# Altium PCB binbot_board_ver4.PcbDoc
Units mm, origin at the board's own origin, x right, y up, seen from the top; angles counter-clockwise.
Board outline 120.96 x 80.83 mm, 2 copper layers (Top Layer, Bottom Layer); 24 components, 0 nets, 102 pads, 50 vias.
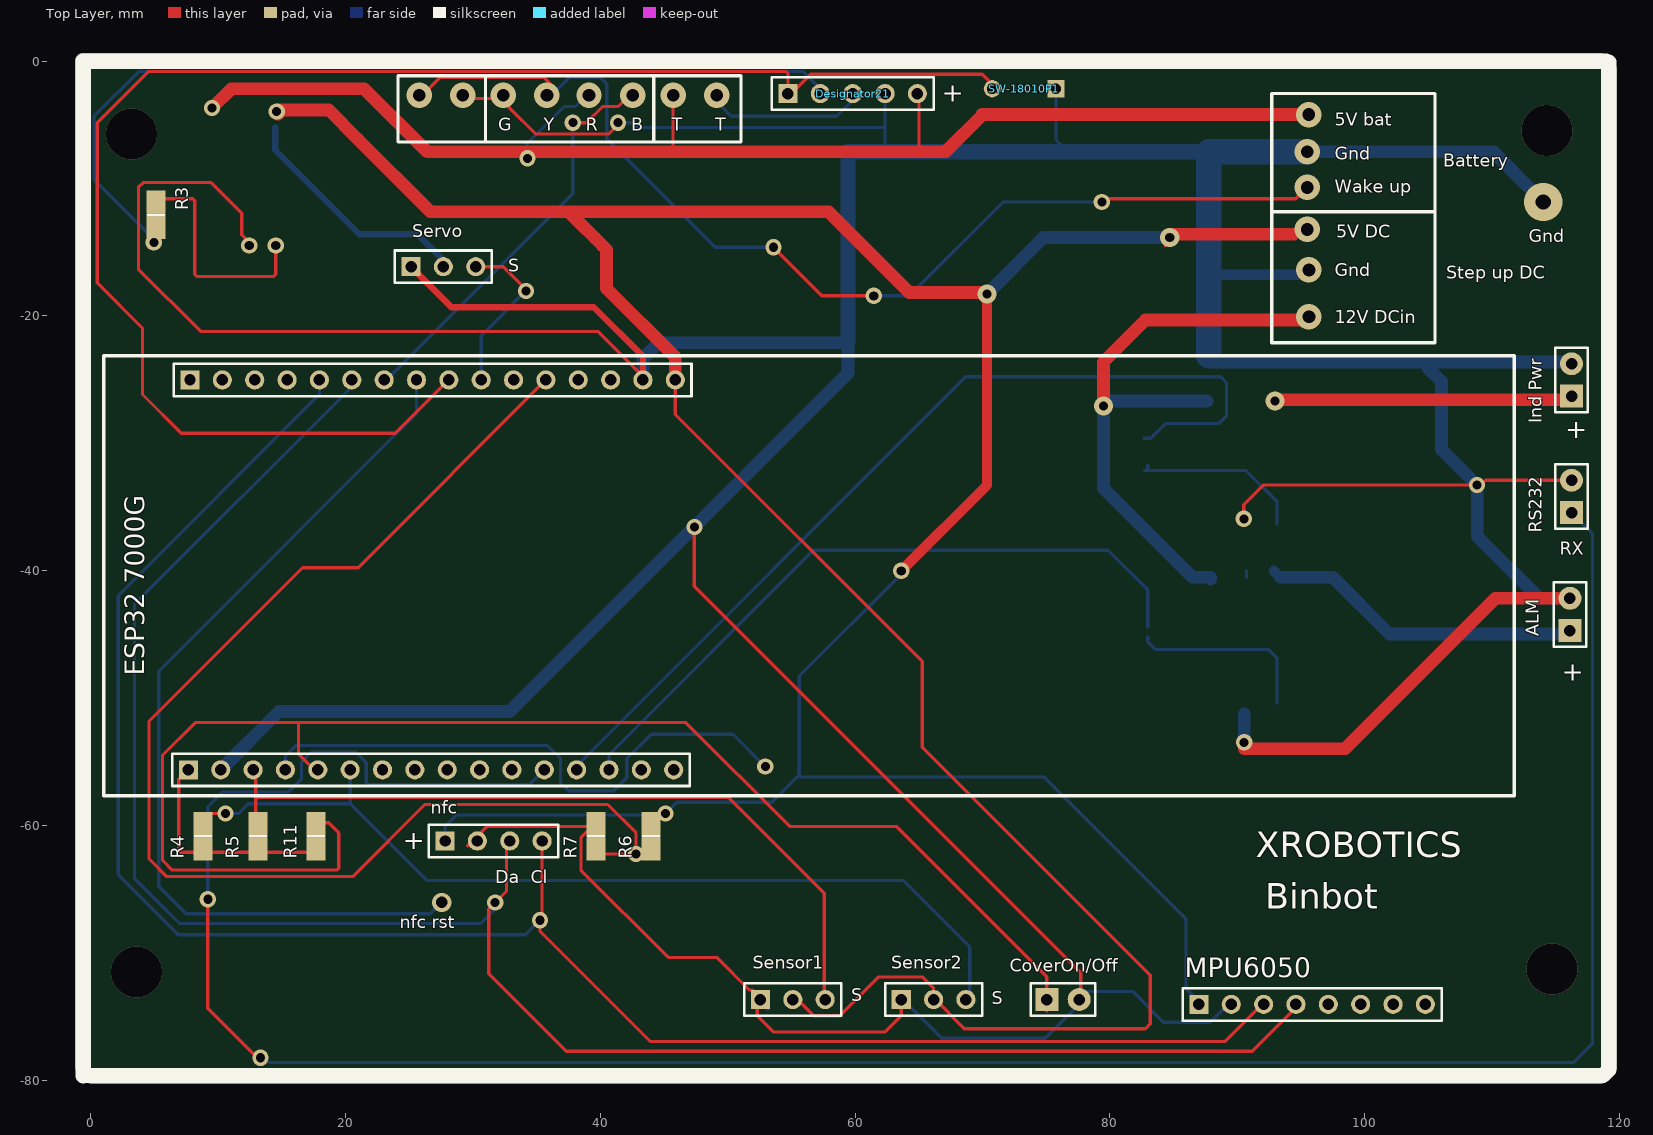
[diagram p0: Top Layer view]
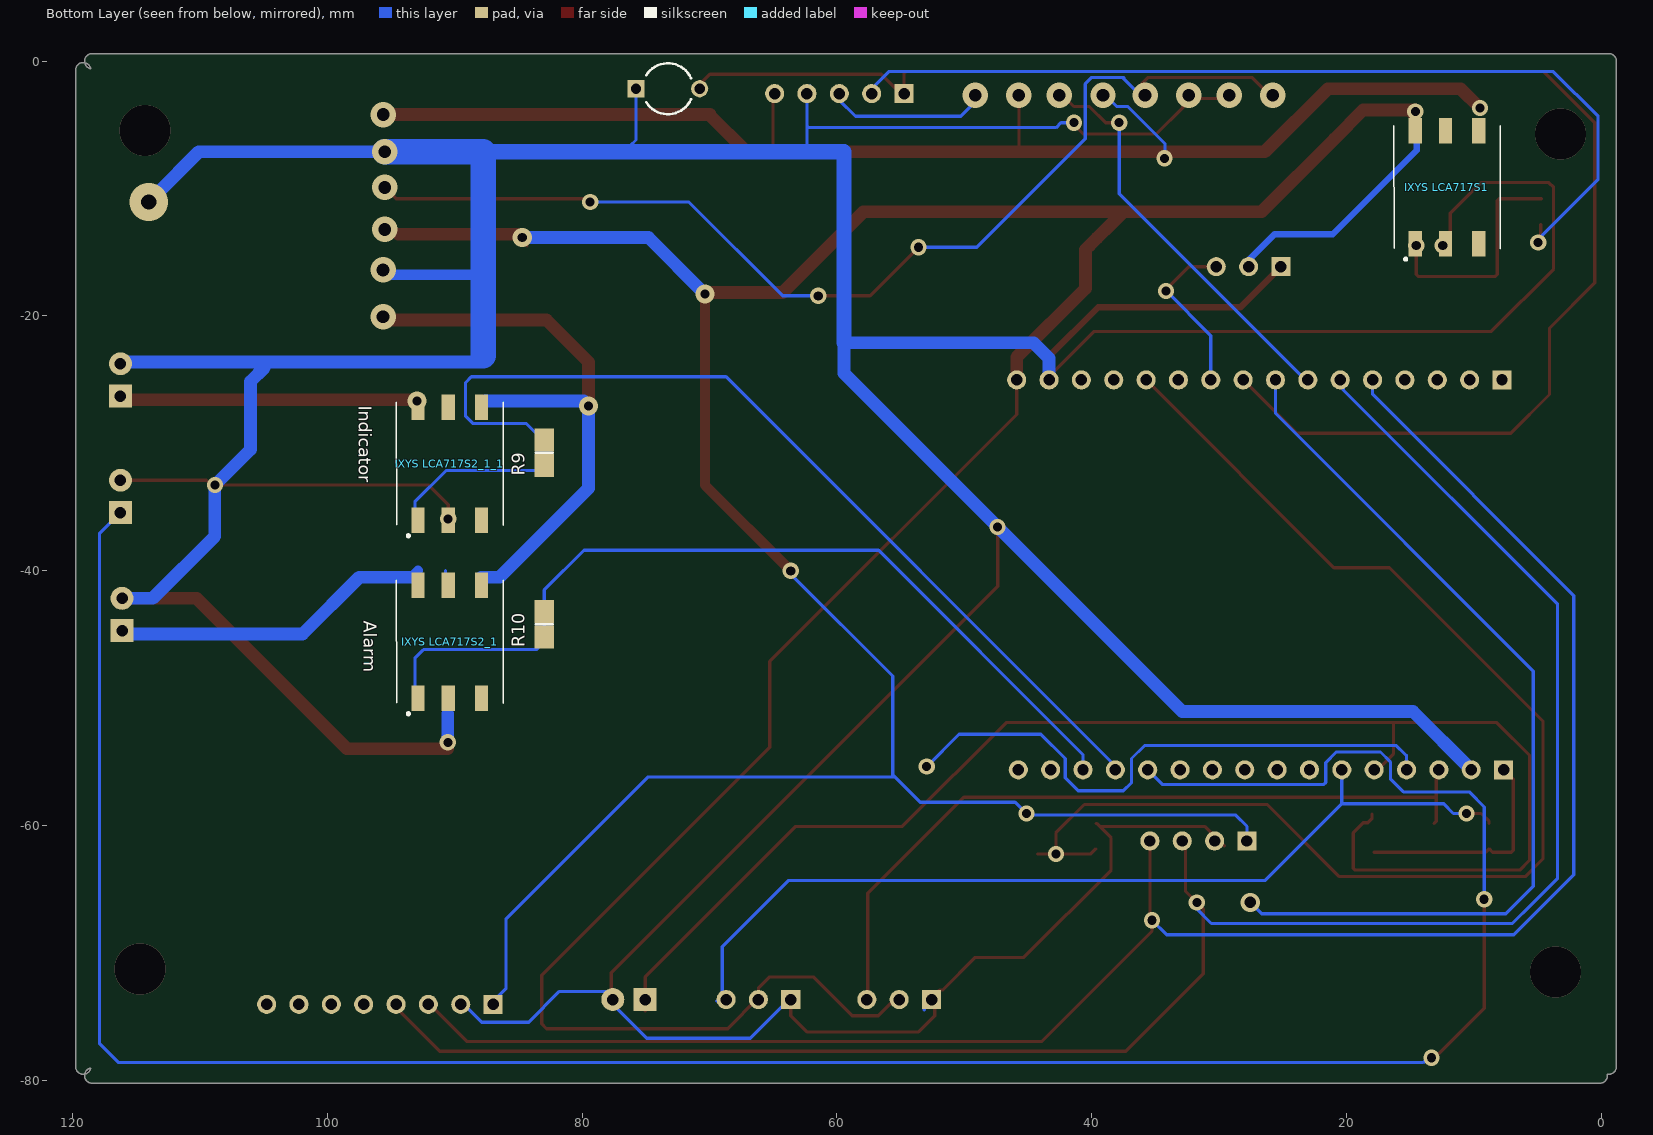
[diagram p1: Bottom Layer view, seen from below]

## Layer stack, top to bottom
Top Solder: solder mask 0.0102, Solder Resist, Dk 3.5
Top Layer: signal copper 0.0356
Dielectric 1: dielectric 0.32, FR-4, Dk 4.8
Bottom Layer: signal copper 0.0356
Bottom Solder: solder mask 0.0102, Solder Resist, Dk 3.5

## Board outline
-0.475,-79.516 cw(c-0.589,-78.926) -1.189,-78.926 -1.189,0 cw(c-0.589,0) -0.589,0.6 118.469,0.6 cw(c118.469,0) 119.07,0 119.059,-0.113 cw(c118.469,0) 118.583,-0.59 cw(c119.172,-0.703) 119.059,-0.113 cw(c119.172,-0.703) 119.773,-0.703 119.773,-78.926 cw(c119.172,-78.926) 119.059,-79.516 cw(c119.172,-78.926) 118.583,-79.039 cw(c118.469,-79.629) 119.059,-79.516 119.07,-79.629 cw(c118.469,-79.629) 118.469,-80.229 0.114,-80.229 cw(c0.114,-79.629)

## Design rules (kind name [scope] priority, off if disabled: settings)
Clearance [All] p1: gap=0.254 ignorepadtopadclearanceinfootprint=FALSE except(0: Arc-Hole Track-Hole SMDPad-Hole THPad-Hole Via-Hole Fill-Hole Poly-Hole Region-Hole Text-Hole)
PolygonConnect [All] p1: connectstyle=Relief reliefconductorwidth=0.254 reliefentries=4 polygonreliefangle="90 Angle" airgapwidth=0.254
RoutingVias [All] p1: holewidth=0.711 width=1.27 viastyle="Through Hole" minholewidth=0.711 minwidth=1.27 maxholewidth=0.711 maxwidth=1.27
SolderMaskExpansion [All] p1: expansion=0.102 istentingtop=FALSE
Width [All] p1: maxlimit=0.254 minlimit=0.254 preferedwidth=0.254
30 further rules are at their usual default settings.

## Components (designator, comment, footprint, x,y, rotation, side; value= is the part's Value field where it differs from the comment)
ALM "Comment" HDR1X2 116.251,-26.289 r90 top
CoverOn/Off "Comment" HDR1X2 75.057,-73.66 r0 top
Designator21 "Comment" HDR1X5 54.737,-2.54 r0 top
"ESP32 7000G" "ESP32 7000G" HDR1X16 7.793,-25.019 r0 top
"Ind Pwr" "Comment" HDR1X2 116.124,-44.704 r90 top
"IXYS LCA717S1" "IXYS LCA717S" *SON160P500X500X140-6N 12.111,-9.897 r90 bottom
"IXYS LCA717S2_1" "IXYS LCA717S" *SON160P500X500X140-6N 90.394,-45.584 r90 bottom
"IXYS LCA717S2_1_1" "IXYS LCA717S" *SON160P500X500X140-6N 90.394,-31.614 r90 bottom
MPU6050 "Comment" HDR1X8 86.995,-74.041 r0 top
nfc "Comment" HDR1X4 27.813,-61.214 r0 top
R3 "0.5K Ohms" 6-0805_M 5.126,-12.065 r90 top (schematic designator R2)
R4 "4.7K Ohms" 6-0805_M 8.809,-60.833 r90 top (schematic designator R3)
R5 "4.7K Ohms" 6-0805_M 13.127,-60.833 r90 top (schematic designator R3)
R6 "0.5K Ohms" 6-0805_M 43.988,-60.833 r90 top (schematic designator R3)
R7 "1K Ohms" 6-0805_M 39.67,-60.833 r90 top (schematic designator R3)
R9 "0.5K Ohms" 6-0805_M 82.977,-30.75 r90 bottom (schematic designator R3)
R10 "0.5K Ohms" 6-0805_M 82.977,-44.212 r90 bottom (schematic designator R3)
R11 "4.7K Ohms" 6-0805_M 17.699,-60.833 r90 top (schematic designator R3)
RS232 "Comment" HDR1X2 116.251,-35.433 r90 top
Sensor1 "Comment" HDR1X3 52.578,-73.66 r0 top
Sensor2 "Comment" HDR1X3 63.627,-73.66 r0 top
Servo "Comment" HDR1X3 25.146,-16.129 r0 top
SW-18010P1 "SW-18010P" CAPR5-4X5 73.279,-2.159 r180 top
? "Comment" HDR1X16 7.666,-55.626 r0 top

## Footprints (in the part's own frame and the unit in brackets; to place one, negate y for a bottom-side part, rotate by r counter-clockwise, add the part's x,y. Pads: shape width x height; smd on the part's side, far side on the other; paste and mask are expansions set on the pad)
6-0805_M [mm] "Chip Resistor, Body 2.0x1.2mm, IPC Low Density"
  rect 1.8x1.5 smd: 1(-1,0) 2(1,0)
  silkscreen extent 0,-0.65 0,0.65, body extent -1.07,-0.7 1.07,0.7, height 0.7
*SON160P500X500X140-6N [mm]
  rect 2x1.03 smd: 1(-4.436,2.489) 2(-4.436,0.127) 3(-4.436,-2.489) 4(4.436,-2.489) 5(4.436,0.127) 6(4.436,2.489)
  silkscreen extent -5.74,-4.19 4.83,4.19
CAPR5-4X5 [mm] "Capacitor; 2 Leads"
  rect 1.35x1.35 hole 0.8: 1(-2.5,0)
  round 1.35 hole 0.8: 2(2.5,0)
HDR1X2 [mm] "Connector; Header; 2 Position"
  rect 1.8x1.8 hole 0.9: 1(0,0)
  round 1.8 hole 0.9: 2(2.54,0)
  silkscreen extent -1.27,-1.27 3.81,1.27
HDR1X3 [mm] "Connector; Header; 3 Position"
  rect 1.5x1.5 hole 0.9: 1(0,0)
  round 1.5 hole 0.9: 2(2.54,0) 3(5.08,0)
  silkscreen extent -1.27,-1.27 6.35,1.27
HDR1X4 [mm] "Connector; Header; 4 Position"
  rect 1.5x1.5 hole 0.9: 1(0,0)
  round 1.5 hole 0.9: 2(2.54,0) 3(5.08,0) 4(7.62,0)
  silkscreen extent -1.27,-1.27 8.89,1.27
HDR1X5 [mm] "Connector; Header; 5 Position"
  rect 1.5x1.5 hole 0.9: 1(0,0)
  round 1.5 hole 0.9: 2(2.54,0) 3(5.08,0) 4(7.62,0) 5(10.16,0)
  silkscreen extent -1.27,-1.27 11.43,1.27
HDR1X8 [mm] "Connector; Header; 8 Position"
  rect 1.5x1.5 hole 0.9: 1(0,0)
  round 1.5 hole 0.9: 2(2.54,0) 3(5.08,0) 4(7.62,0) 5(10.16,0) 6(12.7,0) 7(15.24,0) 8(17.78,0)
  silkscreen extent -1.27,-1.27 19.05,1.27
HDR1X16 [mm] "Connector; Header; 16 Position"
  rect 1.5x1.5 hole 0.9: 1(0,0)
  round 1.5 hole 0.9: 2(2.54,0) 3(5.08,0) 4(7.62,0) 5(10.16,0) 6(12.7,0) 7(15.24,0) 8(17.78,0) 9(20.32,0) 10(22.86,0) 11(25.4,0) 12(27.94,0) 13(30.48,0) 14(33.02,0) 15(35.56,0) 16(38.1,0)
  silkscreen extent -1.27,-1.27 39.37,1.27

## Part data
SW-18010P1: library part Cap2

## Via types
v1: diameter 1.27, hole 0.711, Top Layer to Bottom Layer, 25 vias
v2: diameter 2, hole 1, Top Layer to Bottom Layer, 14 vias
v3: diameter 1.5, hole 0.711, Top Layer to Bottom Layer, 5 vias
v4: diameter 4, hole 4, Top Layer to Bottom Layer, 4 vias
v5: diameter 1.5, hole 0.9, Top Layer to Bottom Layer, 1 vias
v6: diameter 3, hole 1.2, Top Layer to Bottom Layer, 1 vias

## Nets (pads, with @x,y where several pads share a name; then routed paths per layer and width w, separated by ;. In a path a pad name is that pad's centre, name@x,y a point inside that pad or via, vN(x,y) a via of type N, cw(c..) or ccw(c..) an arc to the next point about the centre after c; other vN are vias at no path point)
pads on no net: "ESP32 7000G.1" "ESP32 7000G.2" "ESP32 7000G.3" "ESP32 7000G.4" "ESP32 7000G.5" "ESP32 7000G.6" "ESP32 7000G.7" "ESP32 7000G.8" "ESP32 7000G.9" "ESP32 7000G.10" "ESP32 7000G.11" "ESP32 7000G.12" "ESP32 7000G.13" "ESP32 7000G.14" "ESP32 7000G.15" "ESP32 7000G.16" "Ind Pwr.1" "Ind Pwr.2" "IXYS LCA717S1.1" "IXYS LCA717S1.2" "IXYS LCA717S1.3" "IXYS LCA717S1.4" "IXYS LCA717S1.5" "IXYS LCA717S1.6" "IXYS LCA717S2_1.1" "IXYS LCA717S2_1.2" "IXYS LCA717S2_1.3" "IXYS LCA717S2_1.4" "IXYS LCA717S2_1.5" "IXYS LCA717S2_1.6" "IXYS LCA717S2_1_1.1" "IXYS LCA717S2_1_1.2" "IXYS LCA717S2_1_1.3" "IXYS LCA717S2_1_1.4" "IXYS LCA717S2_1_1.5" "IXYS LCA717S2_1_1.6" ?.1 ?.2 ?.3 ?.4 ?.5 ?.6 ?.7 ?.8 ?.9 ?.10 ?.11 ?.12 ?.13 ?.14 ?.15 ?.16 ALM.1 ALM.2 CoverOn/Off.1 CoverOn/Off.2 Designator21.1 Designator21.2 Designator21.3 Designator21.4 Designator21.5 MPU6050.1 MPU6050.2 MPU6050.3 MPU6050.4 MPU6050.5 MPU6050.6 MPU6050.7 MPU6050.8 nfc.1 nfc.2 nfc.3 nfc.4 R3.1 R3.2 R4.1 R4.2 R5.1 R5.2 R6.1 R6.2 R7.1 R7.2 R9.1 R9.2 R10.1 R10.2 R11.1 R11.2 RS232.1 RS232.2 Sensor1.1 Sensor1.2 Sensor1.3 Sensor2.1 Sensor2.2 Sensor2.3 Servo.1 Servo.2 Servo.3 SW-18010P1.1 SW-18010P1.2
copper on no net: | length 2606.4
  Top Layer w0.254: 4.711,-10.795 8.025,-10.795 8.174,-10.944 8.174,-16.742 8.323,-16.891 14.375,-16.891 14.524,-16.742 v1(14.524,-14.478) ; v1@4.745,-14.351 4.745,-12.827 ; 7.666,-55.626 6.916,-56.376 6.916,-56.884 6.916,-61.954 7.065,-62.103 8.539,-62.103 8.809,-61.833 9.079,-62.103 13.127,-62.103 17.849,-62.103 ; 8.809,-59.833 8.809,-59.678 9.432,-59.055 v1@10.333,-59.055 ; v1(9.19,-65.786) 9.19,-74.341 13.081,-78.232 v1(13.335,-78.232) ; v1(12.446,-14.478) 12.446,-14.219 11.857,-13.63 11.857,-12.192 11.857,-11.938 9.444,-9.525 7.703,-9.525 5.746,-9.525 4.11,-9.525 3.741,-9.894 3.741,-16.314 8.636,-21.209 24.765,-21.209 39.797,-21.209 43.48,-24.892 ; 12.746,-55.626 12.954,-55.834 12.954,-57.785 12.954,-59.66 13.127,-59.833 ; 13.072,-57.785 50.038,-57.785 57.577,-65.324 57.577,-73.833 57.785,-74.041 ; 15.667,-55.626 15.667,-55.507 ; 16.302,-51.92 16.302,-54.356 17.789,-55.843 ; 17.953,-25.227 17.953,-25.019 ; 18.005,-59.107 18.005,-59.466 18.322,-59.783 18.681,-59.783 19.477,-60.579 19.477,-63.351 19.328,-63.5 6.396,-63.5 5.634,-62.738 5.634,-54.483 8.197,-51.92 46.713,-51.92 54.864,-60.071 63.246,-60.071 75.057,-71.882 75.057,-73.66 75.057,-74.544 ; v2@25.781,-2.159 26.543,-2.159 27.432,-1.27 35.56,-1.27 v2@36.068,-1.778 ; 27.686,-16.129 27.686,-16.002 ; 28.113,-25.019 23.922,-29.21 7.112,-29.21 4.064,-26.162 4.064,-20.955 0.508,-17.399 0.508,-4.826 4.525,-0.809 54.588,-0.809 54.737,-0.958 54.737,-2.159 55.372,-2.159 56.515,-1.016 69.215,-1.016 69.977,-1.016 71.12,-2.159 ; 29.591,-61.595 30.099,-61.087 31.1,-60.086 39.367,-60.086 ; v2@29.591,-2.921 32.167,-2.921 v2@32.385,-3.139 ; 30.226,-16.129 32.385,-16.129 34.163,-17.907 v1(34.163,-18.034) ; v2(32.385,-2.667) v2@32.385,-3.139 ; 32.639,-61.214 32.639,-65.151 v1(31.75,-66.04) 31.242,-66.548 31.242,-71.628 37.338,-77.724 91.186,-77.724 94.615,-74.295 94.615,-73.914 ; 35.433,-61.214 35.433,-67.272 v1(35.268,-67.437) 35.268,-68.288 43.942,-76.962 89.039,-76.962 92.081,-73.92 ; 35.733,-25.019 20.987,-39.765 16.623,-39.765 4.572,-51.816 4.572,-62.611 5.969,-64.008 20.554,-64.008 26.21,-58.352 40.578,-58.352 42.81,-60.584 v1@42.81,-62.355 ; 37.511,-11.811 37.511,-11.557 ; v1(37.846,-4.826) 38.912,-4.826 40.182,-3.556 41.402,-3.556 v2@42.545,-2.413 ; 39.67,-61.833 40.067,-62.23 v1(42.81,-62.23) 44.242,-62.23 ; 39.67,-59.833 39.62,-59.833 38.481,-60.972 38.481,-63.5 45.339,-70.358 49.149,-70.358 51.701,-72.91 51.955,-72.91 52.324,-73.279 52.324,-73.533 ; 40.321,-24.781 40.492,-24.781 41.067,-25.356 41.067,-25.527 ; v1(41.402,-4.826) 41.402,-4.988 40.675,-5.715 34.925,-5.715 32.854,-3.644 32.854,-3.608 v2@32.385,-3.139 ; v2@42.545,-3.429 v2(42.545,-2.667) ; 45.72,-6.858 v2(45.72,-2.667) ; 45.893,-25.019 45.893,-27.732 65.278,-47.117 65.278,-53.848 83.185,-71.755 83.185,-75.565 82.804,-75.946 68.58,-75.946 66.167,-73.533 66.167,-72.771 65.278,-71.882 64.135,-71.882 63.627,-71.882 61.849,-71.882 61.087,-72.644 58.801,-74.93 56.769,-74.93 55.118,-73.279 ; v1(47.388,-36.559) 47.388,-41.208 64.77,-58.591 77.724,-71.545 77.724,-73.025 77.47,-73.279 ; 52.324,-74.041 52.324,-74.93 53.594,-76.2 62.357,-76.2 63.627,-74.93 63.627,-73.533 ; v1(53.594,-14.605) 57.404,-18.415 v1(61.468,-18.415) ; 65.024,-7.112 65.024,-2.032 ; v1@79.121,-11.303 79.629,-10.795 94.604,-10.795 v2(95.493,-9.906) ; 84.328,-14.499 84.709,-14.118 v3(84.709,-13.843) ; v1(90.521,-35.923) 90.521,-34.798 90.539,-34.78 91.537,-33.782 92.045,-33.274 v1(108.839,-33.274) 109.114,-33.274 109.495,-32.893 116.251,-32.893 117.024,-32.893 ; v1@90.551,-53.975 v1(90.551,-53.467) ; v2@95.377,-20.32 v2(95.631,-20.066)
  Top Layer w0.5: 25.146,-16.129 28.321,-19.304 39.497,-19.304 43.353,-23.16 43.353,-24.765 ; 115.87,-26.67 116.251,-26.289
  Top Layer w0.8: v1(63.627,-40.005) 70.358,-33.274 70.358,-18.611 70.289,-18.542 v3@70.231,-18.542 ; v3@70.231,-18.161 v3(70.358,-18.288) ; v3(84.709,-13.843) 84.836,-13.843 v3@85.09,-13.589 ; v3(92.964,-26.67) v3@93.054,-26.58 ; 94.424,-13.589 94.575,-13.438 94.96,-13.438 95.112,-13.589 v2(95.493,-13.208) ; 115.78,-26.58 115.87,-26.67
  Top Layer w1: v1(9.525,-3.683) 11.049,-2.159 21.463,-2.159 26.416,-7.112 65.024,-7.112 67.102,-7.112 70,-4.214 ; v1@14.6,-3.836 18.695,-3.836 20.955,-6.096 26.67,-11.811 37.511,-11.811 ; v1@14.652,-4.139 14.725,-4.139 v1@15.029,-3.836 ; 40.177,-14.477 39.58,-13.88 ; 45.893,-25.019 45.893,-23.241 40.492,-17.839 40.492,-14.791 39.58,-13.88 ; 69.977,-4.191 70.739,-4.191 v2@95.377,-4.191 ; v3@70.231,-18.161 64.262,-18.161 57.912,-11.811 37.511,-11.811 ; v3(79.502,-27.051) 79.502,-23.622 82.804,-20.32 95.106,-20.32 95.169,-20.257 95.314,-20.257 v2@95.377,-20.32 ; v3@85.09,-13.589 94.424,-13.589 ; v1@90.749,-53.975 90.551,-53.975 98.471,-53.975 110.282,-42.164 116.124,-42.164 ; v3@93.054,-26.58 115.78,-26.58 ; 37.511,-11.811 38.471,-12.771 39.58,-13.88
  Bottom Layer w0.254: v1(4.953,-14.224) 4.953,-13.97 0.254,-9.271 0.254,-4.318 3.763,-0.809 55.927,-0.809 57.277,-2.159 ; v1(9.19,-65.786) 9.19,-58.547 10.373,-57.364 15.528,-57.364 16.556,-56.336 16.556,-55.003 17.33,-54.229 20.801,-54.229 21.636,-55.064 21.636,-56.626 21.785,-56.775 34.458,-56.775 35.606,-55.626 ; v1(10.587,-59.055) 11.603,-59.055 12.365,-58.293 20.382,-58.293 ; v1(13.335,-78.232) 13.61,-78.232 13.991,-78.613 116.378,-78.613 117.902,-77.089 117.902,-37.084 116.251,-35.433 ; 15.286,-55.626 15.286,-54.527 15.445,-54.368 16.092,-53.721 35.86,-53.721 36.876,-54.737 36.876,-56.642 37.511,-57.277 41.067,-57.277 42.083,-56.261 42.083,-54.737 43.988,-52.832 50.419,-52.832 v1(52.959,-55.372) ; 17.826,-24.892 18.207,-24.511 ; 17.953,-25.019 17.953,-26.159 2.159,-41.954 2.159,-63.881 6.858,-68.58 31.75,-68.58 34.125,-68.58 v1(35.268,-67.437) ; 18.207,-55.626 18.398,-55.816 ; 20.366,-55.626 20.382,-55.642 20.382,-58.293 ; 20.493,-25.572 20.278,-25.572 20.255,-25.595 20.255,-25.81 3.429,-42.636 3.429,-64.135 5.461,-66.167 6.985,-67.691 30.607,-67.691 31.75,-66.548 v1@31.75,-66.294 ; 20.493,-25.145 20.493,-25.019 ; 23.033,-25.019 23.239,-25.019 37.846,-10.412 v1(37.846,-4.826) ; 25.573,-25.019 25.573,-27.64 5.334,-47.879 5.334,-64.77 6.985,-66.421 7.493,-66.929 26.669,-66.929 v5@27.558,-66.04 ; 27.813,-61.214 27.813,-60.071 28.702,-59.182 45.004,-59.182 v1(45.131,-59.055) 46.02,-58.166 53.467,-58.166 55.626,-56.007 55.626,-54.61 55.626,-48.26 63.627,-40.259 v1(63.627,-40.005) ; 30.653,-25.019 30.653,-21.544 v1(34.163,-18.034) ; v1(34.29,-7.62) 34.25,-7.58 34.25,-6.477 37.171,-3.556 38.052,-3.556 38.941,-2.667 v2(39.116,-2.667) ; v2@36.195,-2.667 37.592,-1.27 ; 37.465,-1.27 40.005,-1.27 40.513,-1.778 40.513,-6.096 49.022,-14.605 v1(53.594,-14.605) ; 38.146,-55.626 38.146,-55.326 68.707,-24.765 88.696,-24.765 89.154,-25.223 89.154,-27.863 88.569,-28.448 84.374,-28.448 83.231,-29.591 82.677,-29.591 ; 40.686,-55.626 40.686,-54.437 56.737,-38.386 79.858,-38.386 82.977,-41.505 82.977,-43.012 82.977,-44.39 ; v1(41.402,-4.826) 42.418,-4.826 42.799,-5.207 46.101,-5.207 46.59,-5.207 62.23,-5.207 62.357,-5.08 ; v1(42.81,-62.23) v1@42.81,-61.989 ; 43.226,-55.626 43.371,-55.77 ; v2@45.593,-2.54 v2(45.72,-2.667) ; v2@48.641,-2.667 50.292,-4.318 52.903,-4.318 ; 52.143,-73.479 52.476,-73.479 53.153,-74.156 53.153,-74.489 ; 52.451,-4.318 58.547,-4.318 59.817,-3.048 59.817,-2.54 ; 55.433,-56.2 74.869,-56.2 85.979,-67.31 85.979,-72.771 86.995,-73.787 ; 59.817,-2.159 60.108,-2.159 ; v1(61.468,-18.415) 64.262,-18.415 71.628,-11.049 v1(79.375,-11.049) ; 62.119,-1.921 62.357,-2.159 62.357,-2.54 62.357,-5.08 ; 62.357,-7.112 62.357,-5.207 62.357,-5.08 ; 63.627,-73.533 66.802,-76.708 74.93,-76.708 77.851,-73.787 ; 68.753,-73.071 68.753,-73.242 69.283,-73.771 69.453,-73.771 ; 68.961,-74.041 69.007,-73.995 69.007,-70.064 ; 69.007,-70.612 69.007,-69.515 63.818,-64.326 26.415,-64.326 20.382,-58.293 ; 75.779,-2.159 75.779,-6.183 76.2,-6.604 ; 77.851,-73.025 81.788,-73.025 84.201,-75.438 87.884,-75.438 89.535,-73.787 ; 82.677,-32.131 90.678,-32.131 93.137,-34.59 93.137,-36.322 ; 82.977,-45.212 82.977,-45.562 83.6,-46.185 92.459,-46.185 92.502,-46.228 93.137,-46.863 93.137,-50.419 ; 82.977,-32.1 82.977,-31.75 ; 90.551,-51.252 90.48,-51.181 90.629,-51.032 ; 90.724,-40.513 90.724,-40.005 ; 100.838,-23.947 100.838,-23.619 ; v6@113.157,-10.795 113.781,-10.795 v6(114.035,-11.049) ; 116.251,-23.749 116.257,-23.749 116.759,-23.247
  Bottom Layer w0.5: 14.478,-5.207 14.478,-6.985 21.082,-13.589 25.654,-13.589 27.813,-15.748
  Bottom Layer w0.8: 88.011,-16.764 v2@95.106,-16.764 ; 92.883,-40.005 93.391,-40.513 ; v2@95.263,-13.438 v2(95.493,-13.208) ; v2@95.306,-16.383 v2(95.631,-16.383)
  Bottom Layer w1: 10.206,-55.626 14.778,-51.054 32.893,-51.054 59.453,-24.494 59.453,-22.098 ; 43.353,-25.019 43.353,-23.322 44.577,-22.098 59.182,-22.098 ; v3(70.358,-18.288) 74.803,-13.843 v3(84.709,-13.843) ; 87.64,-26.67 79.883,-26.67 v3(79.502,-27.051) 79.502,-33.528 86.476,-40.502 87.89,-40.502 87.905,-40.517 87.905,-40.648 ; 88.014,-23.619 100.838,-23.619 115.882,-23.619 116.119,-23.856 116.119,-23.881 ; v1(90.551,-53.467) 90.551,-51.252 ; 93.391,-40.513 97.506,-40.513 101.951,-44.958 116.124,-44.958 ; v2(95.493,-7.112) 110.098,-7.112 113.469,-10.483 v6(114.035,-11.049) ; 104.965,-24.066 106.045,-25.146 106.045,-30.48 v1(108.839,-33.274) 108.839,-37.292 113.711,-42.164 116.505,-42.164
  Bottom Layer w1.2: 59.453,-22.098 59.453,-7.112 62.357,-7.112 87.757,-7.112
  Bottom Layer w2: 87.757,-23.114 87.757,-18.161 ; 87.757,-18.288 87.757,-16.764 87.757,-7.112 v2(95.493,-7.112)
  other v1: 14.6,-3.937
  other v2: 95.62,-4.191 25.781,-2.667 29.21,-2.667 35.814,-2.667 49.149,-2.667
  other v3: 79.502,-27.051
  other v4: 3.602,-71.501 114.727,-71.247 3.198,-5.703 114.323,-5.449
  other v5: 27.559,-66.04

## Silkscreen, mask and mechanical layers (free items; w line width, h text height)
Top Overlay:
  lines w0.254: 105.029,-11.811 105.537,-11.811 ; 30.988,-6.35 24.13,-6.35 24.13,-1.143 30.988,-1.143 ; 30.988,-6.35 30.988,-1.143 ; 30.988,-6.35 44.196,-6.35 ; 30.988,-1.143 44.196,-1.143 ; 44.196,-6.35 51.054,-6.35 51.054,-1.143 48.863,-1.143 46.26,-1.143 44.196,-1.143 ; 44.196,-6.35 44.196,-4.191 44.196,-1.143 ; 92.71,-11.811 92.71,-22.098 105.537,-22.098 105.537,-11.811 ; 92.71,-11.811 92.71,-2.54 103.505,-2.54 105.537,-2.54 105.537,-11.811 ; 92.71,-11.811 105.537,-11.811 ; 1.016,-57.658 1.016,-23.114 111.76,-23.114 111.76,-56.515 111.76,-57.658 110.617,-57.658 1.016,-57.658
  lines w1.2: -0.589,-79.647 -0.589,0 118.97,0 ; -0.468,-79.629 118.718,-79.629 119.172,-79.175 119.172,-0.057
  text "+" at 66.802,-3.175 h1.52
  text "5V bat" at 97.663,-5.08 h1
  text "G" at 32.004,-5.461 h1
  text "Y" at 35.56,-5.461 h1
  text "R" at 38.862,-5.461 h1
  text "B" at 42.418,-5.461 h1
  text "T" at 45.593,-5.461 h1
  text "T" at 49.022,-5.461 h1
  text "Gnd" at 97.663,-7.747 h1
  text "Battery" at 106.172,-8.303 h1
  text "Wake up" at 97.663,-10.335 h1
  text "5V DC" at 97.79,-13.843 h1
  text "Gnd" at 112.903,-14.224 h1
  text "S" at 32.766,-16.51 h1
  text "Gnd" at 97.663,-16.891 h1
  text "Step up DC" at 106.426,-17.066 h1
  text "12V DCin" at 97.663,-20.574 h1
  text "+" at 115.743,-29.591 h1.52
  text "RX" at 115.316,-38.735 h1
  text "+" at 115.489,-48.641 h1.52
  text "+" at 24.511,-61.849 h1.52
  text "XROBOTICS" at 91.44,-62.484 h2
  text "Da" at 31.75,-64.516 h1
  text "Cl" at 34.544,-64.516 h1
  text "Binbot" at 92.202,-66.548 h2
  text "nfc rst" at 24.257,-68.072 h1
  text "S" at 59.69,-73.787 h1
  text "S" at 70.739,-74.041 h1
Bottom Overlay:
  text "Indicator" at 97.536,-27.051 h1 r90
  text "Alarm" at 97.155,-43.942 h1 r90